# Altium PCB MB542.PCBDOC
Units mil, origin at the board's own origin, x right, y up, seen from the top; angles counter-clockwise.
Board outline 3312.09 x 1737.28 mil, 4 copper layers (TopLayer, MidLayer1, InternalPlane1, BottomLayer); 24 components, 43 nets, 175 pads, 160 vias.
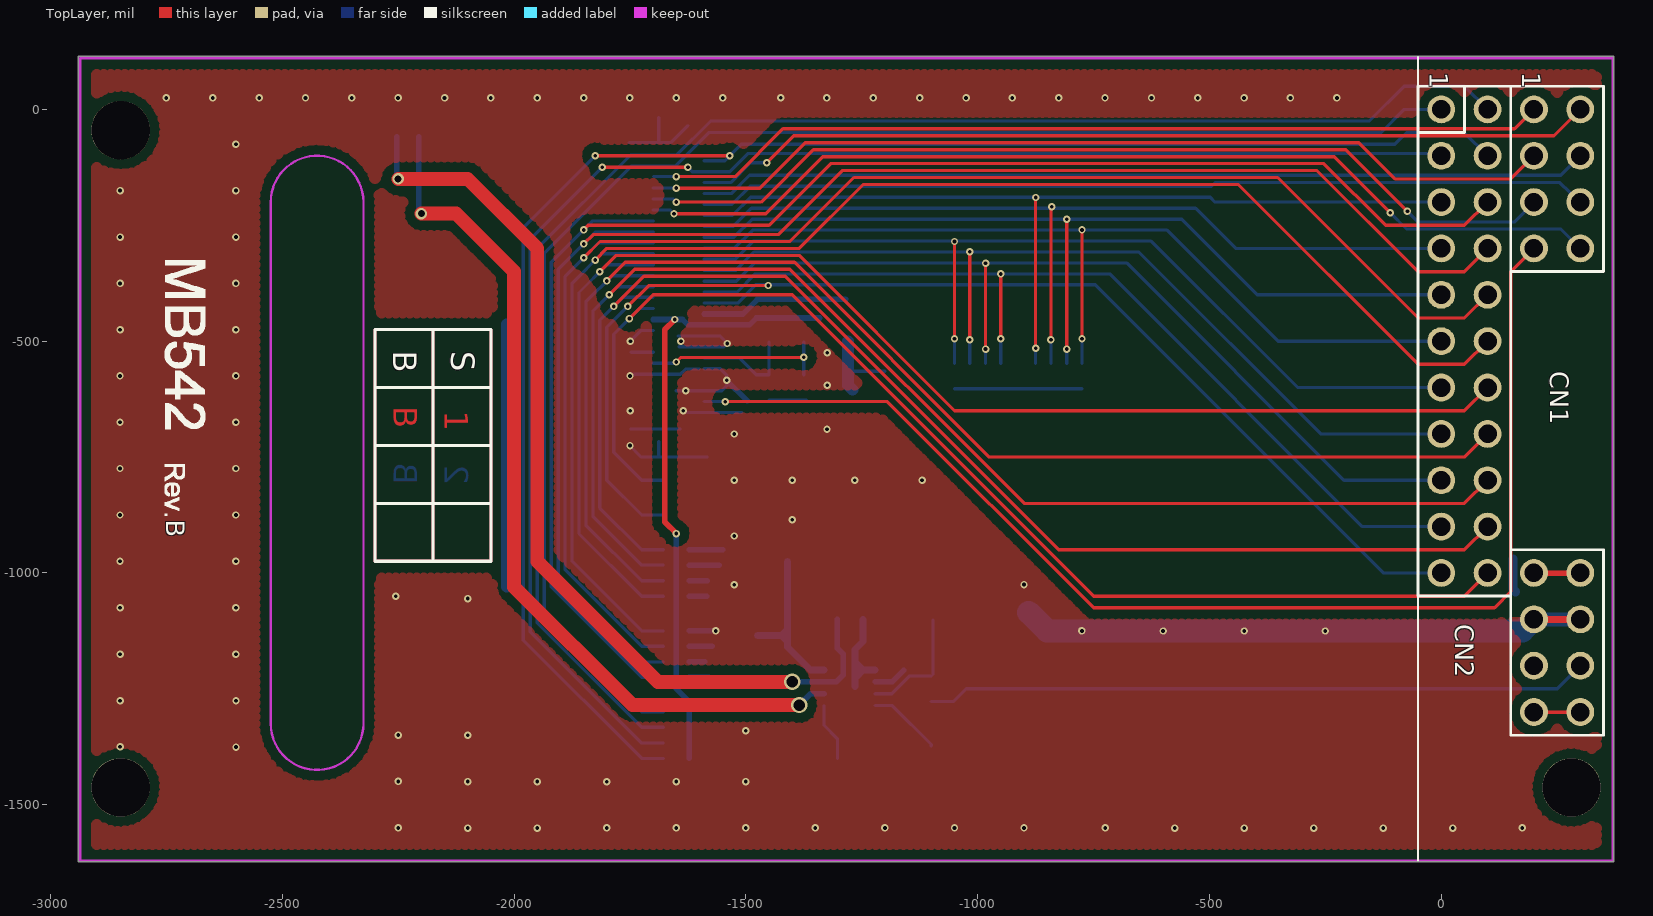
[diagram p0: TopLayer view]
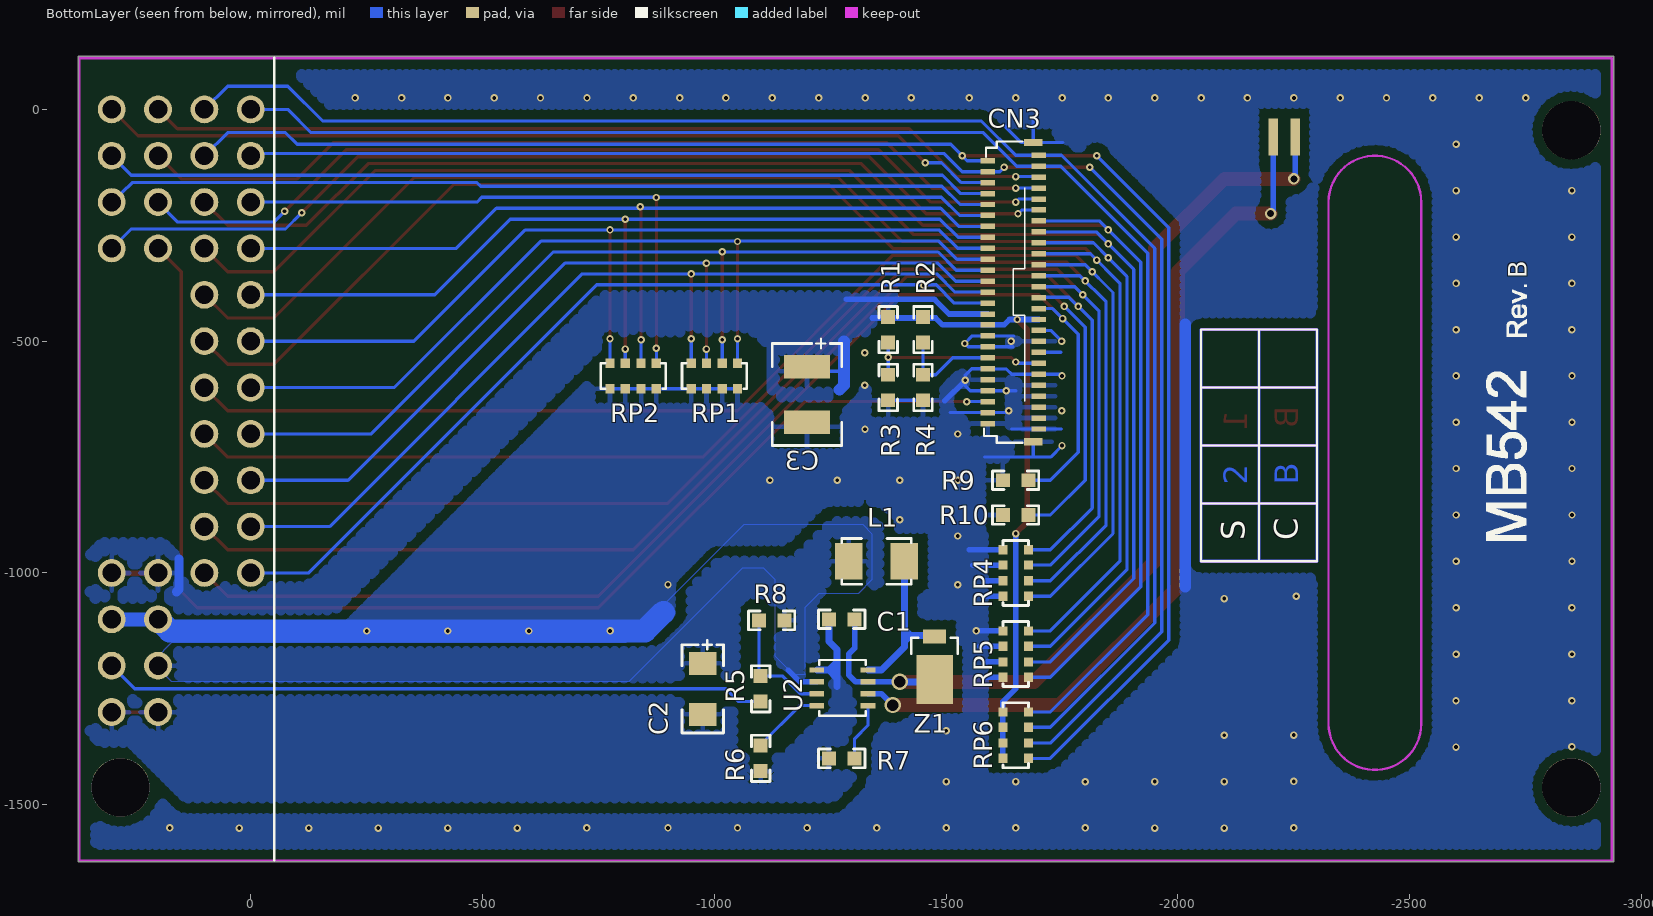
[diagram p1: BottomLayer view, seen from below]
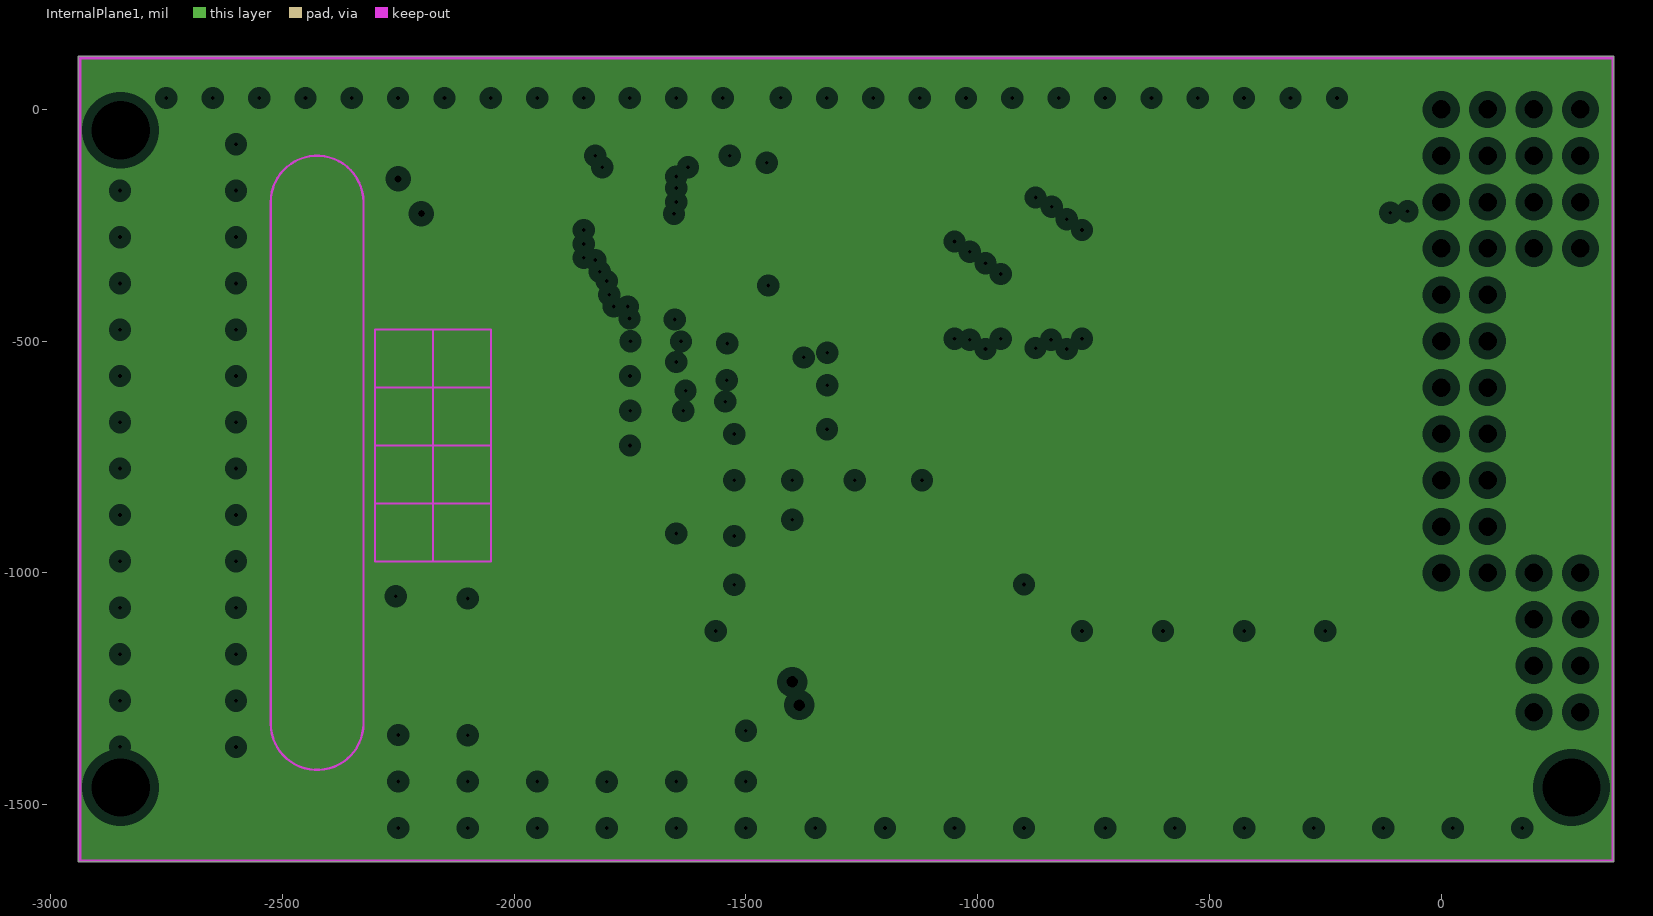
[diagram p2: InternalPlane1, clearances drawn from the general rule]

## Layer stack, top to bottom
TopLayer: signal copper 1.4
Dielectric: dielectric 12.6, FR-4, Dk 4.8
MidLayer1: signal copper 1.4
Dielectric: dielectric 12.6, FR-4, Dk 4.8
InternalPlane1: plane copper 1.4
Dielectric: dielectric 12.6, FR-4, Dk 4.8
BottomLayer: signal copper 1.4

## Board outline
-2940.08,-1622.78 372,-1622.78 372,114.5 -2940.08,114.5

## Design rules (kind name [scope] priority, off if disabled: settings)
Clearance Clearance_2 [((InPoly)) And InNet('GND')] p1: gap=20
Clearance [All] p2: gap=8
ComponentClearance [All] p1 off: gap=10 collisioncheckmode=0
PlaneClearance [All] p1: clearance=20
PlaneConnect [All] p1: planeconnectstyle=Relief reliefexpansion=20 reliefentries=4 reliefconductorwidth=10 reliefairgap=10
PolygonConnect [All] p1: connectstyle=Relief reliefconductorwidth=10 reliefentries=4 polygonreliefangle="90 Angle"
RoutingLayers [All] p1: top layer_v5=TRUE mid layer 1_v5=FALSE bottom layer_v5=TRUE
RoutingVias RoutingVias_1 [All] p1: holewidth=8 width=16 viastyle="Through Hole" minholewidth=8 minwidth=16 maxholewidth=28 maxwidth=50
SolderMaskExpansion [All] p1: expansion=4
TestPointUsage [All] p1: valid=0 allowmultiple=FALSE
Testpoint [All] p1: side=15 testpointundercomponent=TRUE minsize=40 maxsize=100 preferedsize=60 minholesize=20 maxholesize=40 preferedholesize=32 testpointgrid=1 style=1023 order=1234567890
Width [All] p1: maxlimit=300 minlimit=7 preferedwidth=7
14 further rules are at their usual default settings.

## Classes and differential pairs
component class ColorLCD_ModuleA: C1 C2 CN1 CN3 L1 R1 R2 R3 R4 R5 R6 R7 R8 RP1 RP2 RP3 RP4 RP5 U2 Z1
component class ColorLCD_Module: C1 C2 CN1 CN3 L1 R1 R2 R3 R4 R5 R6 R7 R8 U2 Z1

## Components (designator, comment, footprint, x,y, rotation, side; value= is the part's Value field where it differs from the comment)
C1 "1uF/50V" 0603 -1275,-1100 r180 bottom
C2 "2.2uF" TAN-A -975,-1250 r270 bottom
C3 "1uF/50V" TAN-B -1200,-615 r270 bottom
CN1 "Color LCD module" AM240320A 75,0 r0 top
CN2 "do not fit" 2*11P 0,0 r0 top
CN3 "AM240320LTNQW00H" AM240320B -2643,-2 r180 bottom
L1 "22uH" 3225 -1350,-975 r0 bottom
R1 "4K7" 0603 -1375,-475 r90 bottom
R2 "4K7" 0603 -1450,-475 r90 bottom
R3 "do not fit" 0603 -1375,-600 r90 bottom
R4 "do not fit" 0603 -1450,-600 r90 bottom
R5 "0" 0603 -1100,-1250 r270 bottom
R6 "100K" 0603 -1100,-1400 r90 bottom
R7 "15" 0603 -1275,-1400 r180 bottom
R8 "do not fit" 0603 -1123.61,-1102.28 r180 bottom
R9 "4K7" 0603 -1650,-800 r180 bottom
R10 "4K7" 0603 -1650,-875 r180 bottom
RP1 "10K" RES-4B -1000,-575 r0 bottom
RP2 "10K" RES-4B -825,-575 r0 bottom
RP4 "10K" RES-4B -1650,-1000 r90 bottom
RP5 "10K" RES-4B -1650,-1175 r90 bottom
RP6 "10K" RES-4B -1650,-1350 r90 bottom
U2 "STLD20D-C8" SOT23-8L -1276.39,-1247.72 r90 bottom
Z1 "STPS1L40M" DO216AA -1475,-1165 r90 bottom

## Footprints (in the part's own frame and the unit in brackets; to place one, negate y for a bottom-side part, rotate by r counter-clockwise, add the part's x,y. Pads: shape width x height; smd on the part's side, far side on the other; paste and mask are expansions set on the pad)
2*11P [mil]
  round 60 hole 40: 1(0,0) 2(100,0) 3(0,-100) 4(100,-100) 5(0,-200) 6(100,-200) 7(0,-300) 8(100,-300) 9(0,-400) 10(100,-400) 11(0,-500) 12(100,-500) 13(0,-600) 14(100,-600) 15(0,-700) 16(100,-700) 17(0,-800) 18(100,-800) 19(0,-900) 20(100,-900) 21(0,-1000) 22(100,-1000)
  silkscreen extent -50,-1050 150,50
0603 [mil]
  rect 30x30 smd: 1(-27.5,0) 2(27.5,0)
  silkscreen extent -50,-20 50,20
3225 [mm]
  rect 1.5x2 smd: 1(1.524,0) 2(-1.524,0)
  silkscreen extent -1.91,-1.25 1.91,1.25
AM240320A [mil]
  round 125.98 hole 125.98 unplated: 0(-2923.94,-1462.72) 0(-2923.94,-1462.72) 0(-2923.94,-45) 0(205.98,-1462.72)
  round 60 hole 40: 1(125,0) 2(225,0) 3(125,-100) 4(225,-100) 5(125,-200) 6(225,-200) 7(125,-300) 8(225,-300) 9(125,-1000) 10(225,-1000) 11(125,-1100) 12(225,-1100) 13(125,-1200) 14(225,-1200) 15(125,-1300) 16(225,-1300)
  silkscreen extent -125,-1620 -125,112
AM240320B [mm]
  rect 1x0.4 smd: 0(-24.252,-18.161) 0(-24.252,-1.761)
  rect 0.8x0.3 smd: 1(-23.952,-2.461) 2(-26.752,-2.761) 3(-23.952,-3.061) 4(-26.752,-3.361) 5(-23.952,-3.661) 6(-26.752,-3.961) 7(-23.952,-4.261) 8(-26.752,-4.561) 9(-23.952,-4.861) 10(-26.752,-5.161) 11(-23.952,-5.461) 12(-26.752,-5.761) 13(-23.952,-6.061) 14(-26.752,-6.361) 15(-23.952,-6.661) 16(-26.752,-6.961) 17(-23.952,-7.261) 18(-26.752,-7.561) 19(-23.952,-7.861) 20(-26.752,-8.161) 21(-23.952,-8.461) 22(-26.752,-8.761) 23(-23.952,-9.061) 24(-26.752,-9.361) 25(-23.952,-9.661) 26(-26.752,-9.961) 27(-23.952,-10.261) 28(-26.752,-10.561) 29(-23.952,-10.861) 30(-26.752,-11.161) 31(-23.952,-11.461) 32(-26.752,-11.761) 33(-23.952,-12.061) 34(-26.752,-12.361) 35(-23.952,-12.661) 36(-26.752,-12.961) 37(-23.952,-13.261) 38(-26.752,-13.561) 39(-23.952,-13.861) 40(-26.752,-14.161) 41(-23.952,-14.461) 42(-26.752,-14.761) 43(-23.952,-15.061) 44(-26.752,-15.361) 45(-23.952,-15.661) 46(-26.752,-15.961) 47(-23.952,-16.261) 48(-26.752,-16.561) 49(-23.952,-16.861) 50(-26.752,-17.161) 51(-23.952,-17.461)
  rect 0.508x2.032 smd: 52(-9.902,-1.453) 53(-11.102,-1.453)
  silkscreen extent -65.85,-41.1 -24.72,2.9
DO216AA [mil]
  rect 30x50 smd: 1(27.5,0)
  rect 105.12x78.74 smd: 2(-65.06,0)
  silkscreen extent -10,-50 25,50
RES-4B [mil]
  rect 20x20 smd: 1(50,-27.5) 2(50,27.5) 3(17,-27.5) 4(17,27.5) 5(-17,-27.5) 6(-17,27.5) 7(-50,-27.5) 8(-50,27.5)
  silkscreen extent -70,-28 70,28
SOT23-8L [mm]
  rect 0.3x0.8 smd: 1(0.975,1.4) 2(0.325,1.4) 3(-0.325,1.4) 4(-0.975,1.4) 5(-0.975,-1.4) 6(-0.325,-1.4) 7(0.325,-1.4) 8(0.975,-1.4)
  silkscreen extent -1.52,-1.27 1.52,1.27
TAN-A [mil]
  rect 50x60 smd: 1(-55,0) 2(55,0)
  silkscreen extent -105,-45 95,45
TAN-B [mil]
  rect 50x100 smd: 1(-60,0) 2(60,0)
  silkscreen extent -120,-75 110,75

## Via types
v1: diameter 16, hole 8, TopLayer to BottomLayer, 156 vias
v2: diameter 35, hole 25, TopLayer to BottomLayer, 2 vias
v3: diameter 25, hole 15, TopLayer to BottomLayer, 2 vias

## Nets (pads, with @x,y where several pads share a name; then routed paths per layer and width w, separated by ;. In a path a pad name is that pad's centre, name@x,y a point inside that pad or via, vN(x,y) a via of type N, cw(c..) or ccw(c..) an arc to the next point about the centre after c; other vN are vias at no path point)
#RESET: CN1.8 CN3.11 | length 2136.3
  TopLayer w7: v1(-1655,-225) -1457.31,-225 -1334.31,-102 -231,-102 v1(-110,-223)
  BottomLayer w7: CN3.11 -1662.98,-217.02 v1(-1655,-225) ; v1(-110,-223) -75,-258 257.65,-258 CN1.8@299.94,-300.28
A: C1.2 CN3.52 U2.7 Z1.2 | length 2108.4
  TopLayer w30: v3(-2250,-150) -2100,-150 -1950,-300 -1950,-975 -1690.08,-1234.92 v2(-1399.92,-1234.92)
  BottomLayer w12: CN3.52@-2253.25,-58.98 -2253.25,-146.75 v3(-2250,-150) ; v2(-1399.92,-1234.92) -1305.08,-1234.92 -1290,-1219.84 -1290,-1175 -1302.5,-1162.5 C1.2
  BottomLayer w15: Z1.2@-1479.92,-1234.92 v2(-1399.92,-1234.92)
BL_CONTROL: CN1.14 R5.2 | length 1431.9
  BottomLayer w7: R5.2 -1052.5,-1277.5 -1025,-1250 250.22,-1250 CN1.14@299.94,-1200.28
BLGND: C1.1 C2.2 CN1.15 CN1.16 R6.1 R7.1 U2.1 | length 351.8
  TopLayer w7: CN1.15@199.94,-1300.28 CN1.16@299.94,-1300.28
  BottomLayer w12: -1265.06,-1229.39 -1245,-1209.33 -1245.73,-1209.33 -1265.06,-1190
  BottomLayer w15: -1265.06,-1245 -1265.06,-1165.06 -1247.5,-1147.5 C1.1 ; -1264.39,-1209.33 U2.1
BLVDD: C2.1 CN1.13 L1.1 R8.2 U2.2 | length 71.8
  BottomLayer w12: U2.2 -1184.67,-1234.92 -1159.75,-1210
BSW1: CN3.39 R1.1 R3.2 | length 400.3
  TopLayer w7: v1(-1650,-545) -1640,-535 v1(-1375,-535)
  BottomLayer w7: CN3.39 -1652.72,-547.72 v1(-1650,-545) ; R3.2 R1.1
BSW2: CN3.38 R2.1 R4.2 | length 224.9
  BottomLayer w7: CN3.38 -1514.09,-535.91 -1477.5,-572.5 R4.2 R2.1
CS: CN1.1 CN3.5 | length 1958.7
  TopLayer w7: v1(-1650,-145) -1523.17,-145 -1420.17,-42 158.22,-42 CN1.1@199.94,-0.28
  BottomLayer w7: CN3.5@-1698.85,-145 v1(-1650,-145)
DOTCLK: CN2.4 CN3.2 RP6.7 | length 3550.2
  TopLayer w7: v1(-1825,-100) v1(-1535,-100)
  BottomLayer w7: v1(-1825,-100) -1980,-255 -1980,-1145 -1725,-1400 RP6.7 ; CN3.2 -1545,-110.72 v1@-1529.64,-95.36 ; v1(-1535,-100) -1510,-75 -100,-75 -75,-50 50,-50 CN2.4
ENABLE: CN2.2 CN3.1 RP6.3 | length 3389.4
  BottomLayer w7: RP6.3 -1725,-1333 -1950,-1108 -1950,-300 -1748.91,-98.91 -1650.12,-98.91 -1576.21,-25 -155,-25 -80,50 50,50 CN2.2
GND: C3.2 CN1.11 CN1.12 CN3.0 CN3.33 CN3.34 CN3.35 CN3.36 CN3.37 CN3.40 CN3.41 CN3.42 CN3.43 CN3.44 CN3.45 CN3.47 CN3.48 CN3.49 CN3.50 CN3.51 R3.1 R4.1 R9.1 R10.1 RP1.2 RP1.4 RP1.6 RP1.8 RP2.2 RP2.4 RP2.6 RP2.8 RP4.2 RP4.4 RP4.6 RP4.8 RP5.2 RP5.4 RP5.6 RP5.8 | length 3988.8
  TopLayer w15: CN1.11@209.72,-1100.28 CN1.12@299.94,-1100.28
  BottomLayer w7: -1751.35,-71.35 -1661.35,-71.35 -1625,-35 ; v1(-1750,-725.28) -1725.28,-750 -1582.56,-750 ; v1(-1749,-500) -1725.86,-476.86 CN3.33 ; -1748.46,-689.46 -1640.98,-689.46 ; -1748.1,-524.1 CN3.37 ; v1@-1746.41,-571.35 -1641.35,-571.35 -1630,-560 CN3.40@-1600,-560 ; -1688.19,-748.19 CN3.0@-1688.19,-717.02 ; CN3.0@-1688.19,-71.35 -1688.19,-18.13 ; -1650.26,-606.78 -1551.78,-606.78 -1541.52,-596.52 -1541.52,-573.48 -1555.46,-559.54 CN3.40 ; -1645.73,-488.67 -1556.33,-488.67 v1(-1540,-505) -1547.29,-512.29 -1644,-512.29 ; v1@-1631.24,-654.02 -1509.09,-654.02 ; R4.1 R3.1@-1370,-627.5 ; RP1.8 RP2.2
  BottomLayer w12: RP5.8 -1580,-1225 ; RP5.6 -1588.5,-1192 ; RP5.4 -1573.06,-1158 ; RP5.2 v1(-1565.06,-1125) ; RP4.8 -1584.72,-1050 ; RP4.6 -1583,-1017 ; RP4.4 -1558,-983 ; RP4.2 -1550.28,-950 ; v1(-1541.52,-584.4) -1497.5,-628.41
  BottomLayer w25: -2016,-1030 -2016,-463.17
  BottomLayer w30: CN1.11@199.94,-1100.28 CN1.12@299.94,-1100.28
  BottomLayer w50: -890.06,-1085.22 -850.28,-1125 175.22,-1125 CN1.11@199.94,-1100.28
  other v1: -2250.06,-1550 -2100,-1550.28 -1950,-1550.28 -1800.06,-1550 -1650.06,-1550 -1500.06,-1550 -1350.06,-1550 -1200.06,-1550 -1050.06,-1550 -900.06,-1550 -725,-1550 -575,-1550.28 -425,-1550.28 -275,-1550.28 -125,-1550.28 25,-1550.28 175,-1550 -2100.06,-1450 -1950.06,-1450 -1800,-1450.28 -1650.06,-1450 -1500.06,-1450 -2250.13,-1449.72 -2850,-1375 -2599.94,-1375.57 -2100.06,-1350 -2250.13,-1349.72 -1500,-1340.28 -2849.94,-1275.57 -2599.94,-1275.57 -2850,-1175.28 -2600,-1175.28 -775.06,-1125 -600,-1125.28 -425,-1125.28 -250,-1125.28 -2850,-1075.28 -2600,-1075.28 -2100,-1055.28 -2255.06,-1050 -1525,-1025.28 -900.06,-1025 -2850.06,-975 -2600.06,-975 -1525,-920.28 -1400.06,-885 -2850.06,-875 -2600.06,-875 -1525,-800.28 -1400.06,-800 -1265.06,-800 -1120,-800.28 -2850.13,-774.72 -2600.13,-774.72 -1525,-700.28 -1325.06,-690 -2850.06,-675 -2600.06,-675 -1749.35,-650.13 -1635.13,-650.13 -1630,-606.78 -1324.72,-595.28 -2850.06,-575 -2600.06,-575 -1750.06,-575 -1324.72,-525 -1640.06,-500.46 -2850,-475.28 -2600,-475.28 -2850,-375.28 -2849.94,-375.57 -2600,-375.28 -2599.94,-375.57 -2850,-275.28 -2849.94,-275.57 -2600,-275.28 -2599.94,-275.57 -2850.06,-175 -2850,-175.28 -2600.06,-175 -2600,-175.28 -2600.06,-75 -2750.28,24.65 -2650.28,24.65 -2550,24.72 -2450,24.72 -2350,24.72 -2250.28,24.65 -2150,24.72 -2050.28,24.65 -1950,24.72 -1850,24.72 -1750.28,24.65 -1650.28,24.65 -1550,24.72 -1425.06,25 -1325.28,24.65 -1225,24.72 -1125,24.72 -1025,24.72 -925.28,24.65 -825,24.72 -725.28,24.65 -625,24.72 -525,24.72 -425.28,24.65 -325.28,24.65 -225,24.72
HSYNC: CN2.1 CN3.3 RP6.1 | length 3187.9
  BottomLayer w7: RP6.1 -1725,-1300 -1935,-1090 -1935,-310 -1747.53,-122.53 -1652.53,-122.53 -1580,-50 -130,-50 -80,0 CN2.1
K: CN3.53 U2.6 | length 1884.6
  TopLayer w30: v3(-2200,-225) -2125,-225 -2000,-350 -2000,-1030 -1745,-1285 v2(-1385,-1285)
  BottomLayer w12: CN3.53@-2206.01,-58.98 -2206.01,-218.99 v3(-2200,-225) ; v2(-1385,-1285) -1360.51,-1260.51 U2.6
NetL1_2: L1.2 U2.8 Z1.1 | length 391.2
  BottomLayer w12: -1410,-1150 -1425,-1135 -1410,-1120
  BottomLayer w15: Z1.1@-1474.8,-1135 -1410,-1135 ; L1.2 -1410,-1160 -1360.67,-1209.33 U2.8
NetR5_1: R5.1 R8.1 U2.3 | length 253.3
  BottomLayer w7: U2.3 -1185.51,-1260.51 -1147.5,-1222.5 R5.1 ; R5.1@-1096.11,-1218.61 R8.1
NetU2_4: R6.2 U2.4 | length 158.5
  BottomLayer w7: U2.4 -1183.9,-1286.1 -1100,-1370 R6.2
NetU2_5: R7.2 U2.5 | length 125.9
  BottomLayer w7: U2.5 -1331.5,-1328.5 -1302.5,-1357.5 R7.2
PD0: CN2.5 CN3.12 RP2.7 | length 1967.9
  TopLayer w7: v1(-875,-515) v1(-875,-190)
  BottomLayer w7: CN3.12 -1528.83,-228.83 -1489.5,-189.5 -498.5,-189.5 -488,-200 CN2.5 ; RP2.7 v1(-875,-515)
PD1: CN2.6 CN3.13 RP5.7 | length 3365.5
  TopLayer w7: v1@-1850,-260.21 v1(-1850,-260) -1840,-250 -1450,-250 -1317,-117 -253,-117 -120,-250 50,-250 CN2.6
  BottomLayer w7: CN3.13 -1830.64,-240.64 -1920,-330 -1920,-1030 -1725,-1225 RP5.7
PD2: CN2.7 CN3.14 RP2.5 | length 1980.4
  TopLayer w7: v1(-842,-497) -842,-212 v1(-840,-210)
  BottomLayer w7: CN3.14 -1527.45,-252.45 -1488.13,-213.13 -530,-213.13 -443.13,-300 CN2.7 ; RP2.5 v1(-842,-497)
PD3: CN2.8 CN3.15 RP5.5 | length 3334.3
  TopLayer w7: v1@-1850,-290 v1(-1850,-290.28) -1829.72,-270 -1430,-270 -1292,-132 -268,-132 -50,-350 50,-350 CN2.8
  BottomLayer w7: v1@-1850.14,-290.14 -1824.26,-264.26 CN3.15 ; v1(-1850,-290.28) -1905,-345.28 -1905,-1012 -1725,-1192 RP5.5
PD4: CN2.9 CN3.16 RP2.3 | length 1984.2
  TopLayer w7: v1(-808,-517) v1(-808,-237)
  BottomLayer w7: CN3.16 -1526.07,-276.07 -1486.75,-236.75 -560,-236.75 -396.75,-400 CN2.9 ; RP2.3 v1(-808,-517)
PD5: CN2.10 CN3.17 RP5.3 | length 3301.9
  TopLayer w7: v1@-1850.06,-320.06 -1850.06,-320.22 v1(-1850,-320.28) -1814.72,-285 -1405,-285 -1267,-147 -353,-147 -50,-450 50,-450 CN2.10
  BottomLayer w7: v1@-1850.14,-320.14 -1817.88,-287.88 CN3.17 ; v1(-1850,-320.28) -1890,-360.28 -1890,-993 -1725,-1158 RP5.3
PD6: CN2.11 CN3.18 RP2.1 | length 1992.8
  TopLayer w7: v1(-775,-495) v1(-775,-260)
  BottomLayer w7: CN3.18 -1524.69,-299.69 -1485.37,-260.37 -591.38,-260.37 -351.75,-500 CN2.11 ; RP2.1 v1(-775,-495)
PD7: CN2.12 CN3.19 RP5.1 | length 3234.9
  TopLayer w7: v1(-1825,-325) -1800,-300 -1385,-300 -1247,-162 -438,-162 -50,-550 50,-550 CN2.12
  BottomLayer w7: CN3.19 -1811.5,-311.5 -1875,-375 -1875,-975 -1725,-1125 RP5.1
PD8: CN2.13 CN3.20 RP1.7 | length 1999.4
  TopLayer w7: v1(-1050,-495) v1(-1050,-285)
  BottomLayer w7: CN3.20 -1523.31,-323.31 -1483.99,-283.99 -626.01,-283.99 -310,-600 CN2.13 ; RP1.7 v1(-1050,-495)
PD9: CN2.14 CN3.21 RP4.7 | length 3032.2
  TopLayer w7: v1(-1815,-350) -1780,-315 -1385,-315 -1050,-650 50,-650 CN2.14
  BottomLayer w7: CN3.21 -1800.13,-335.13 -1860,-395 -1860,-915 -1725,-1050 RP4.7
PD10: CN2.15 CN3.22 RP1.5 | length 2009.1
  TopLayer w7: v1(-1017,-497) v1(-1017,-307)
  BottomLayer w7: CN3.22 -1521.94,-346.94 -1482.61,-307.61 -652.39,-307.61 -260,-700 CN2.15 ; RP1.5 v1(-1017,-497)
PD11: CN2.16 CN3.23 RP4.5 | length 2978.8
  TopLayer w7: v1(-1800,-370) -1760,-330 -1395,-330 -975,-750 50,-750 CN2.16
  BottomLayer w7: CN3.23 -1788.75,-358.75 -1845,-415 -1845,-897 -1725,-1017 RP4.5
PD12: CN2.17 CN3.24 RP1.3 | length 2015.7
  TopLayer w7: v1(-983,-517) v1(-983,-332)
  BottomLayer w7: CN3.24 -1520.56,-370.56 -1481.24,-331.24 -678.76,-331.24 -210,-800 CN2.17 ; RP1.3 v1(-983,-517)
PD13: CN2.18 CN3.25 RP4.3 | length 2938.5
  TopLayer w7: v1(-1795,-400) -1740,-345 -1405,-345 -900,-850 50,-850 CN2.18
  BottomLayer w7: CN3.25 -1777.37,-382.37 -1830,-435 -1830,-878 -1725,-983 RP4.3
PD14: CN2.19 CN3.26 RP1.1 | length 2024.4
  TopLayer w7: v1(-950,-495) v1(-950,-355)
  BottomLayer w7: CN3.26 -1519.18,-394.18 -1479.86,-354.86 -715.14,-354.86 -170,-900 CN2.19 ; RP1.1 v1(-950,-495)
PD15: CN2.20 CN3.27 RP4.1 | length 2891.5
  TopLayer w7: v1(-1785,-425) -1720,-360 -1415,-360 -825,-950 50,-950 CN2.20
  BottomLayer w7: CN3.27@-1700.99,-405 -1765,-405 -1815,-455 -1815,-860 -1725,-950 RP4.1
PD16: CN2.21 CN3.28 R10.2 | length 2732.8
  TopLayer w7: v1(-1755,-425) -1710,-380 v1(-1451.52,-380)
  BottomLayer w7: v1(-1755,-425) -1800,-470 -1800,-800 -1725,-875 R10.2 ; CN3.28 -1517.8,-417.8 -1478.48,-378.48 -746.52,-378.48 -125,-1000 CN2.21
PD17: CN2.22 CN3.29 R9.2 | length 2657.7
  TopLayer w7: v1(-1751.26,-451.26) -1700,-400 -1400,-400 -750,-1050 50,-1050 CN2.22
  BottomLayer w7: CN3.29 -1729.61,-429.61 -1785,-485 -1785,-740 -1725,-800 R9.2
RD: CN1.6 CN3.10 | length 1926.2
  BottomLayer w7: CN3.10 -1530.2,-205.2 -1490.88,-165.88 -495.88,-165.88 -488,-158 255.65,-158 CN1.6@299.94,-200.28
RS: CN1.4 CN3.8 | length 1923.4
  BottomLayer w7: CN3.8 -1531.58,-181.58 -1492.26,-142.26 257.96,-142.26 CN1.4@299.94,-100.28
SCL: CN1.2 CN3.6 | length 1955
  TopLayer w7: v1(-1455,-115) -1397,-57 243.22,-57 CN1.2@299.94,-0.28
  BottomLayer w7: CN3.6 -1532.96,-157.96 -1490,-115 v1(-1455,-115)
SDI: CN1.3 CN3.7 | length 1993.5
  TopLayer w7: v1(-1650.23,-169.77) -1650,-170 -1470,-170 -1372,-72 -178,-72 -100,-150 150.22,-150 CN1.3@199.94,-100.28
  BottomLayer w7: CN3.7 v1(-1650.23,-169.77)
SDO: CN1.7 CN3.46 | length 2698.8
  TopLayer w7: v1(-1544.66,-630.4) -1194.6,-630.4 -750,-1075 115,-1075 150,-1040 150,-350.22 CN1.7@199.94,-300.28
  BottomLayer w7: CN3.46 v1(-1544.66,-630.4)
VDD: C3.1 CN1.9 CN1.10 CN3.30 CN3.31 CN3.32 R1.2 R2.2 RP6.2 RP6.4 RP6.6 RP6.8 | length 2026.9
  TopLayer w12: v1(-1653.24,-453.24) -1675,-475 -1675,-890 v1(-1650,-915) ; CN1.9@199.94,-1000.28 CN1.10@299.94,-1000.28
  BottomLayer w7: -1279.72,-565 C3.1@-1200,-565
  BottomLayer w12: CN3.31 -1636.76,-453.24 -1624.95,-465.05 -1492.55,-465.05 -1477.5,-450 -1340.28,-450 ; v1(-1650,-915) -1650,-1250 -1622.5,-1277.5 RP6.8 ; CN3.30 -1506.43,-441.43 -1475,-410 -1285.06,-410
  BottomLayer w20: 155,-970 155,-1035.28 160,-1040.28
  BottomLayer w25: -1279.72,-500.28 -1279.72,-595.28 -1270,-605
VSYNC: CN2.3 CN3.4 RP6.5 | length 3285.3
  TopLayer w7: v1(-1810,-125) v1(-1625,-125)
  BottomLayer w7: v1(-1810,-125) -1965,-280 -1965,-1127 -1725,-1367 RP6.5 ; v1(-1625,-125) -1615.66,-134.34 -1534.34,-134.34 -1495,-95 -5,-95 CN2.3
WR: CN1.5 CN3.9 | length 2031.8
  TopLayer w7: v1(-1650,-200) -1467.31,-200 -1354.31,-87 -206,-87 v1(-73,-220)
  BottomLayer w7: CN3.9 -1656.61,-193.39 v1(-1650,-200) ; v1(-73,-220) -50,-243 157.22,-243 CN1.5@199.94,-200.28
pads on no net: CN1.0
copper on no net: | length 5770
  TopLayer w7: -2300,-850 -2175,-850 -2050,-850 ; -2300,-725 -2155,-725 ; -2175,-725 -2050,-725 ; -2175,-475 -2175,-600 ; -2300,-975 -2175,-975 ; -2300,-975 -2175,-975 ; -2300,-975 -2300,-600 ; -2300,-600 -2175,-600 ; -2300,-600 -2300,-475 -2050,-475 -2050,-600 ; -2175,-975 -2050,-975 ; -2175,-975 -2175,-600 ; -2175,-975 -2050,-975 ; -2175,-600 -2050,-600 ; -2050,-975 -2050,-600
  BottomLayer w7: -2300,-850 -2175,-850 -2050,-850 ; -2300,-725 -2175,-725 -2050,-725 ; -2300,-600 -2175,-600 ; -2175,-475 -2175,-600 ; -2175,-975 -2050,-975 -2050,-600 ; -2175,-975 -2300,-975 -2300,-475 -2050,-475 -2050,-600 ; -2175,-975 -2175,-600 ; -2175,-600 -2050,-600

## Polygon pours and split planes (outlines as drawn)
GND on TopLayer (hatched 90Degree grid 15 track 25, remove dead copper): -2935,110 370,110 370,-1620 -2935,-1620
GND on BottomLayer (hatched 90Degree grid 15 track 25, remove dead copper): -2925,125 375,125 375,-1600 -2950,-1600 -2950,125
VDD on BottomLayer (hatched 90Degree grid 20 track 25, remove dead copper): -1405,-395 -750,-395 -115,-1030 135,-1030 155,-1010 155,-970 190,-935 320,-935 355,-970 355,-1040 340,-1055 180,-1055 155,-1080 -180,-1080 -780,-480 -1090,-480 -1125,-515 -1125,-605 -1140,-620 -1255,-620 -1270,-605 -1270,-510 -1300,-480 -1405,-480
BLGND on BottomLayer (hatched 90Degree grid 20 track 25, remove dead copper): 170,-1150 -810,-1150 -1065,-895 -1320,-895 -1340,-915 -1340,-1015 -1310,-1045 -1225,-1045 -1195,-1075 -1195,-1220 -1171.87,-1220 -1131.87,-1180 -1131.87,-1015 -1106.87,-990 -1060,-990 -815,-1235 170,-1235 199.94,-1205.06 205,-1200 205,-1185
BLVDD on BottomLayer (hatched 90Degree grid 20 track 25, remove dead copper): -1355,-900 -1355,-1025 -1245,-1025 -1215,-1055 -1215,-1205 -1185,-1235 -1155,-1205 -1140,-1190 -1140,-1075 -1110,-1045 -1070,-1045 -1045,-1070 -1045,-1205 -1020,-1230 220,-1230 220,-1165 -890,-1165 -950,-1105 -950,-1035 -1010,-975 -1170,-975 -1255,-890 -1340,-890
BLGND on BottomLayer (hatched 90Degree grid 20 track 25, remove dead copper): -1295,-1240 -1295,-1445 -1255,-1485 140,-1485 260,-1365 325,-1365 355,-1335 355,-1280 340,-1265 -1010,-1265 -1040,-1295 -1040,-1385 -1055,-1400 -1150,-1400 -1245,-1305 -1245,-1230 -1297.59,-1230

## Keep-outs
KeepOutLayer:
  lines w4: -2300,-850 -2175,-850 -2050,-850 ; -2300,-725 -2175,-725 -2050,-725 ; -2175,-475 -2175,-600 ; -2300,-600 -2175,-600 ; -2300,-600 -2300,-975 -2175,-975 ; -2300,-600 -2300,-475 -2050,-475 -2050,-600 ; -2175,-975 -2175,-600 ; -2175,-975 -2050,-975 -2050,-600 ; -2175,-600 -2050,-600
  lines w5: -2937.58,-1620.28 369.5,-1620.28 369.5,112 369.5,110 -2935.58,110 -2935.58,-1620.28 ; -2525,-1325 ccw(c-2425,-1325) -2325,-1325 -2325,-200 ccw(c-2425,-200) -2525,-200 -2525,-1325

## Other copper
TopLayer:
  text "B" at -2260,-640 h50 r270
  text "1" at -2150,-650 h50 r270
BottomLayer:
  text "B" at -2260,-810 h50 r270
  text "2" at -2150,-810 h50 r270

## Silkscreen, mask and mechanical layers (free items; w line width, h text height)
TopOverlay:
  drawing of 968 lines, arcs and shapes, not listed
  text "1" at -25,80 h40 r270
  text "1" at 175,80 h40 r270
  text "B" at -2261,-521 h50 r270
  text "S" at -2136,-522 h50 r270
  text "B" at -2750,-885 h40 r270
BottomOverlay:
  drawing of 961 lines, arcs and shapes, not listed
  text "B" at -2752,-364 h40 r270
  text "C" at -2259,-929 h50 r270
  text "S" at -2144,-929 h50 r270
Mechanical1:
  lines w5: -2937.58,-1620.28 369.5,-1620.28 370,-1619.79 370,112 -2935,110 -2935,-1620.28 ; -2325,-205 -2325,-1325 cw(c-2425,-1325) -2525,-1325 -2525,-200 cw(c-2425,-200) -2325,-200